# EAGLE board power_monitor (EAGLE 9.0.0)
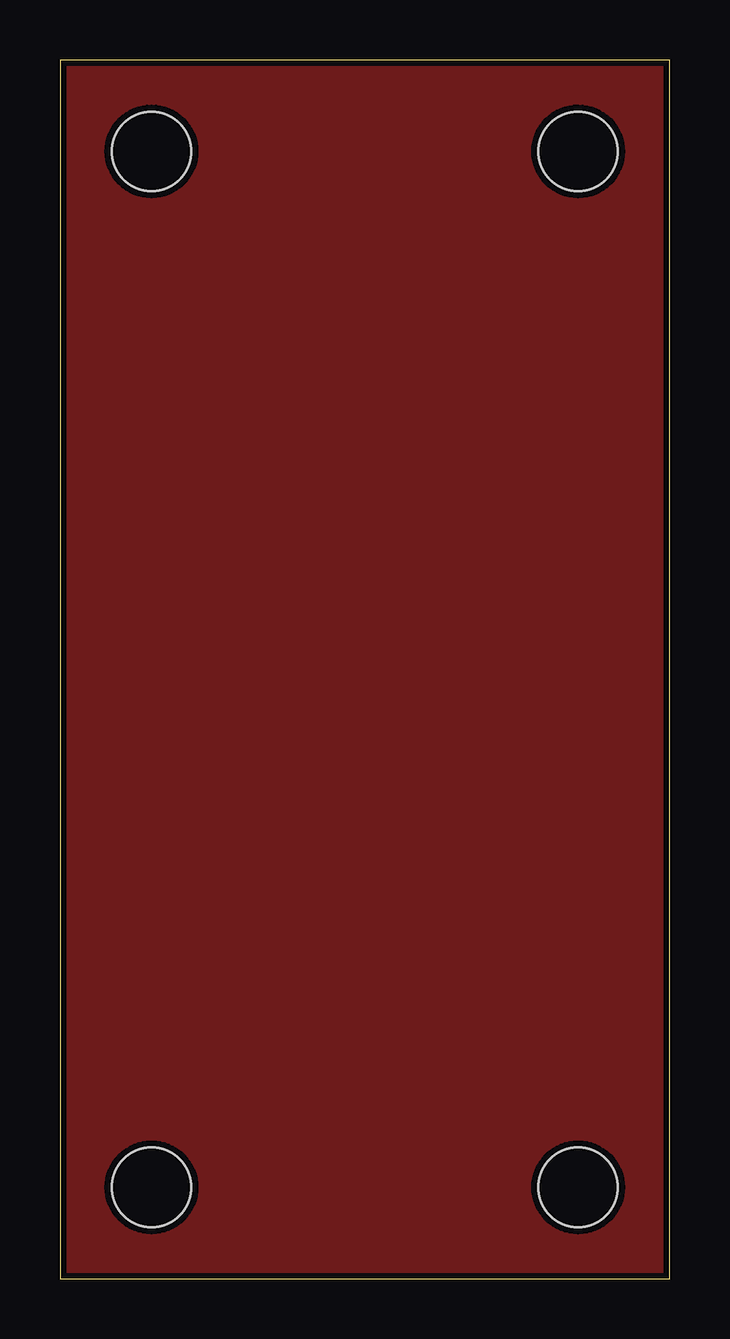
[diagram p0: board, top side]
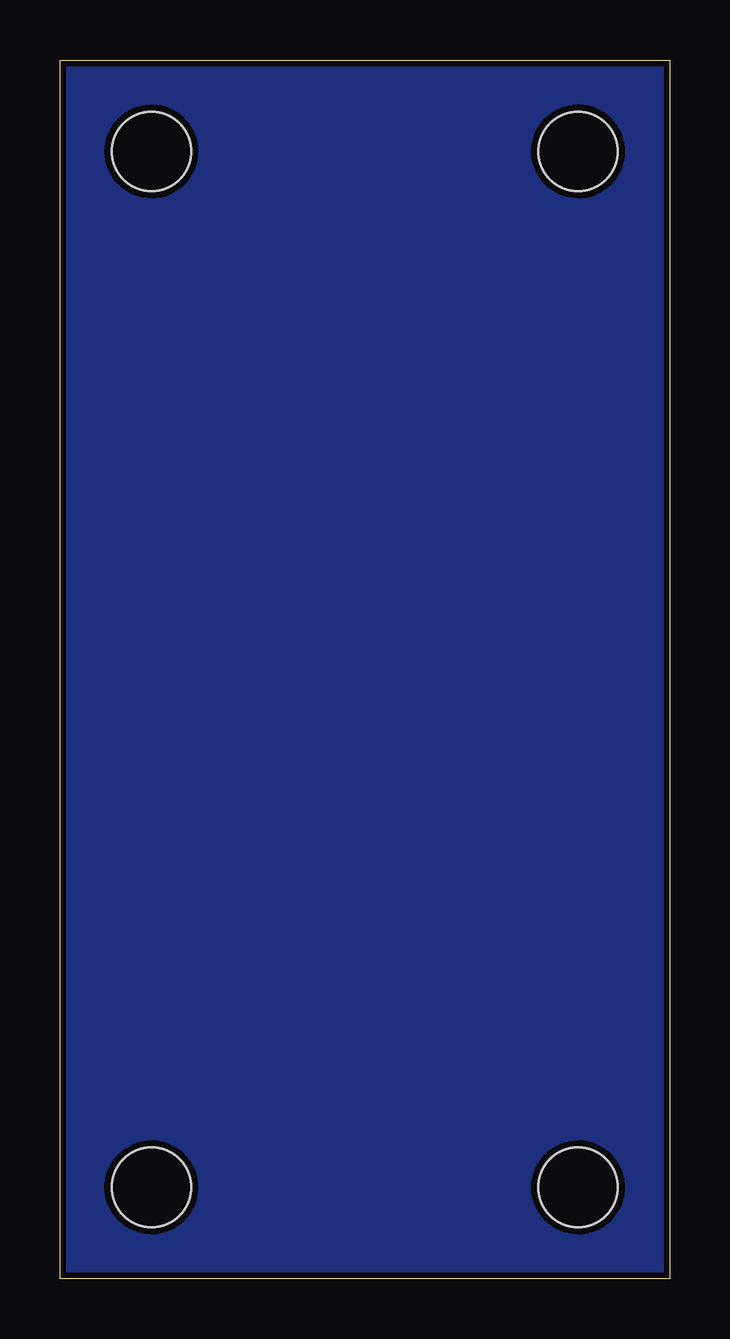
[diagram p1: board, bottom side, seen from below]

Size 25.4 x 50.8 mm. Coordinates in mm from the lower left corner, seen from the top.
Outline: 0,0 25.4,0 25.4,50.8 0,50.8 0,0
Copper layers (1*16): Top 0.035mm / dielectric 1.5mm / Bottom 0.035mm
Design rules "JLCPCB2Layer": minimum track width 6mil, minimum drill 10mil, track to track 6mil, track to pad 6mil, pad to pad 6mil, via to via 6mil, smd to smd 0mil, copper to edge 10mil, drill to drill 10mil, minimum pad ring 6mil, minimum via ring 6mil, stop-mask expansion 2mil, vias tented up to drill 100mil, thermal gap 10mil

## Footprints (pad centres in the part's own frame; a part is rotated, then mirrored left to right if it is on the bottom)
STAND-OFF = hole 3.302: 0,0

## Placement (x,y rotation side)
U$1  [STAND-OFF]  3.81,3.81 0 top
U$2  [STAND-OFF]  21.59,3.81 0 top
U$3  [STAND-OFF]  3.81,46.99 0 top
U$4  [STAND-OFF]  21.59,46.99 0 top

## Library data of the parts
U$1-U$4 = ARVP

## Tracks (layer width: path | path; a pad name or v marks a point on that pad's centre or on a via)
N$1
  pour Top: 0,50.8 0,0 25.4,0 25.4,50.8
N$2
  pour Bottom: 0,50.8 0,0 25.4,0 25.4,50.8

## Text on the board
Document: Increase length to 2.5" or 3.0" if required